# Altium PCB Aptomat_Radio.PcbDoc
Units mm, origin at the board's own origin, x right, y up, seen from the top; angles counter-clockwise.
Board outline 90 x 47 mm, 2 copper layers (Top Layer, Bottom Layer); 36 components, 54 nets, 142 pads, 476 vias.
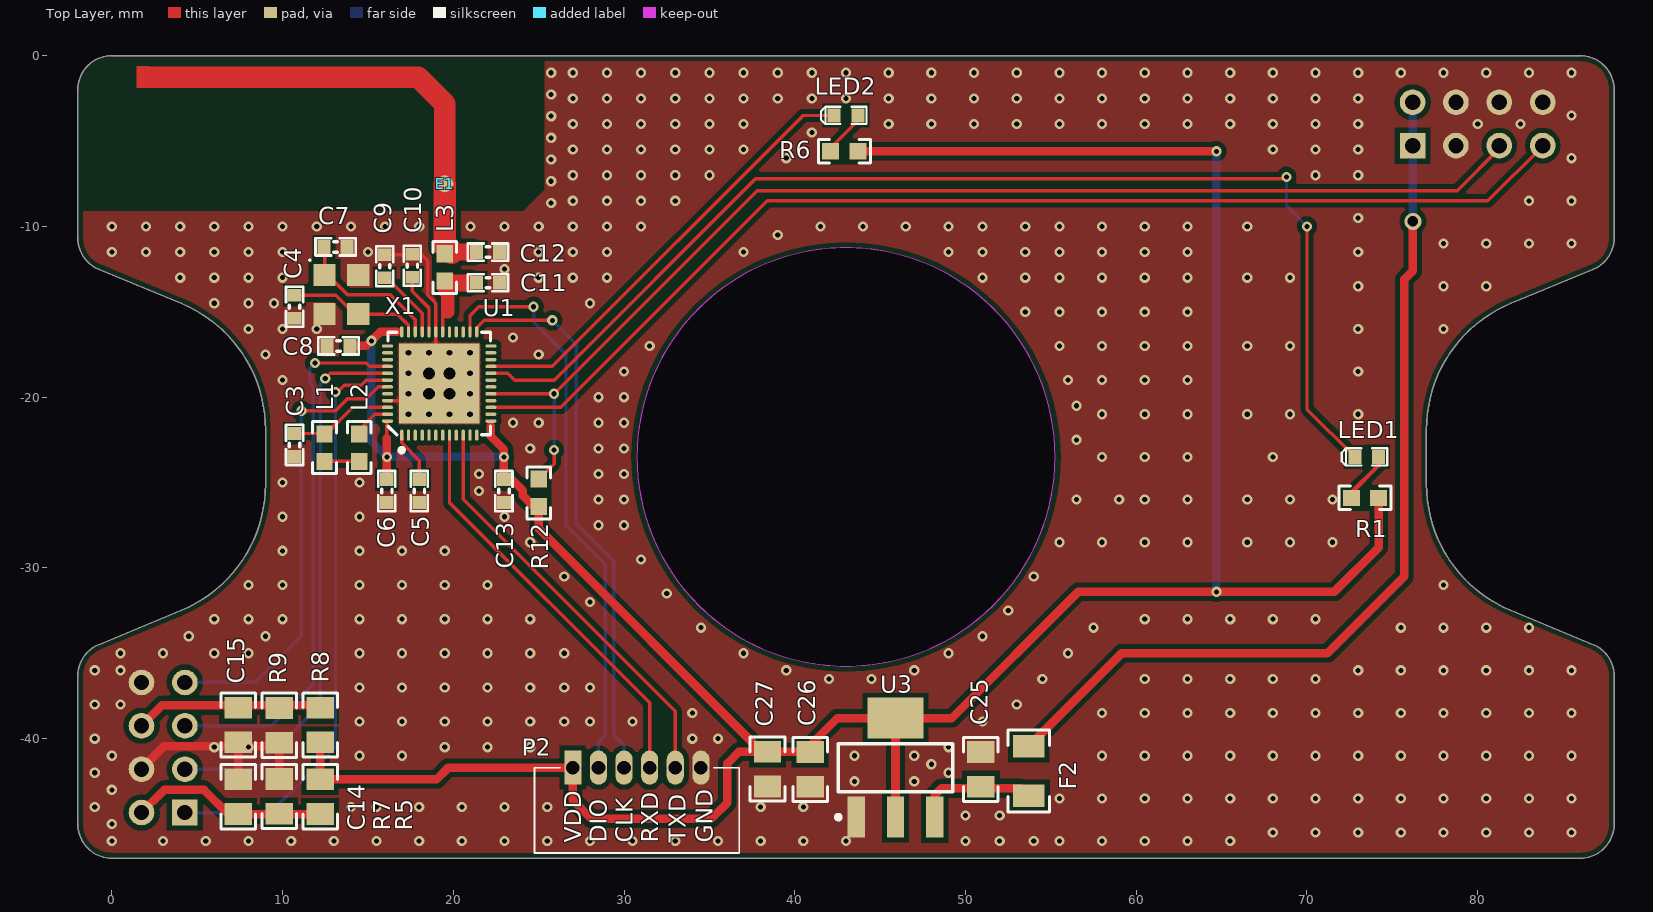
[diagram p0: Top Layer view]
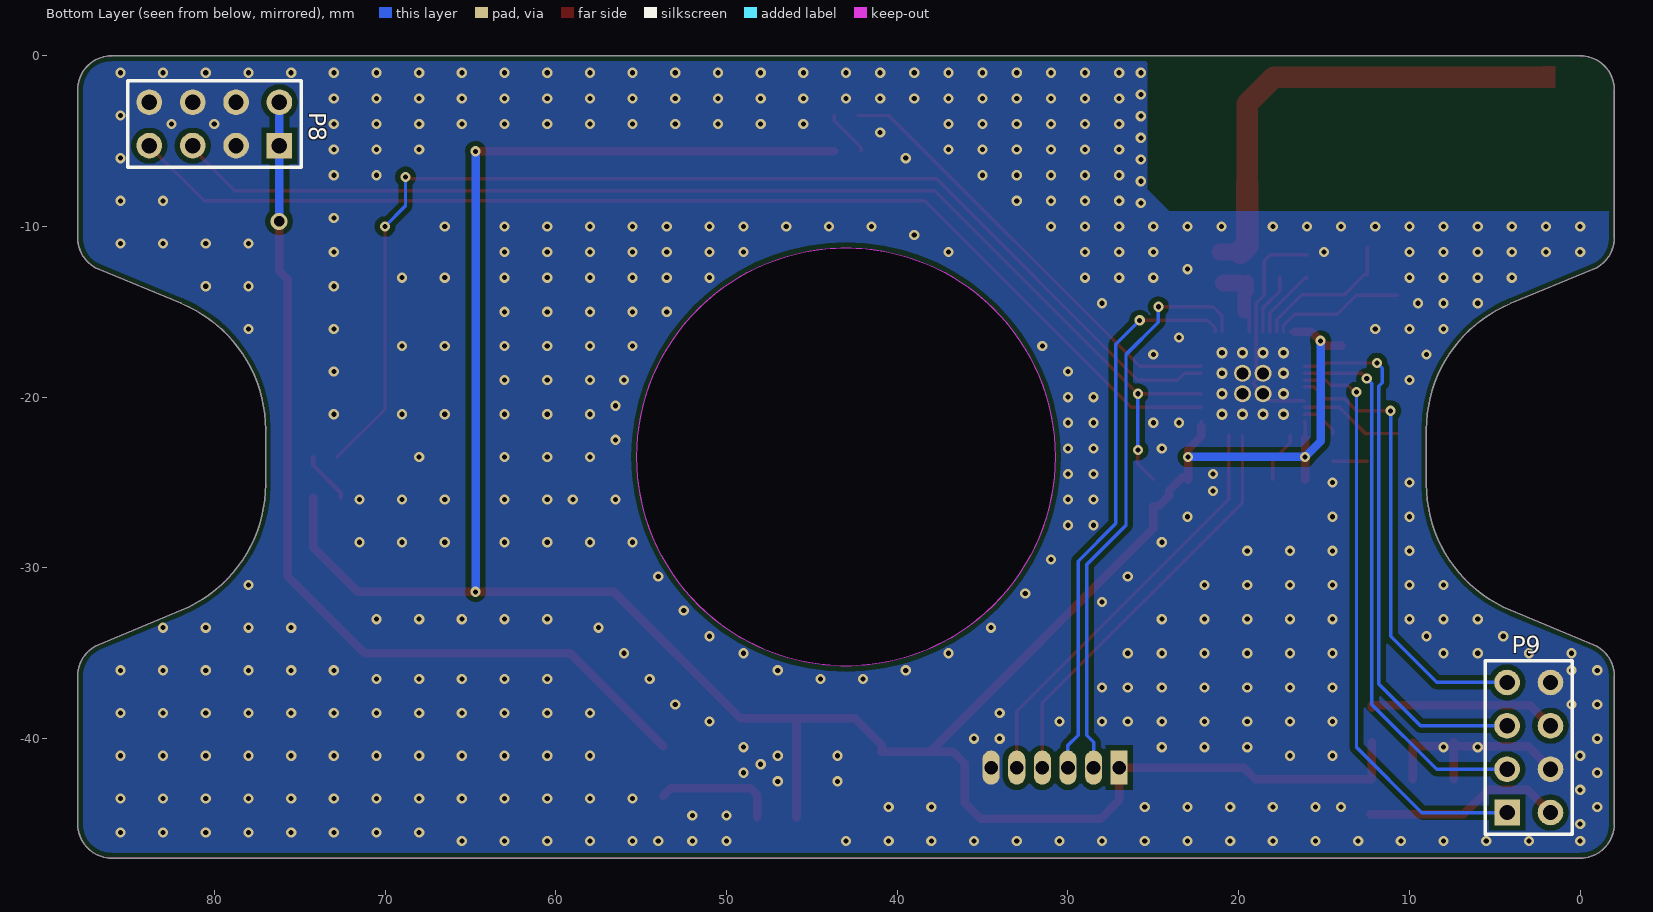
[diagram p1: Bottom Layer view, seen from below]

## Layer stack, top to bottom
Top Solder: solder mask 0.0102, Solder Resist, Dk 3.5
Top Layer: signal copper 0.0356
Dielectric 1: dielectric 0.32, FR-4, Dk 4.8
Bottom Layer: signal copper 0.0356
Bottom Solder: solder mask 0.0102, Solder Resist, Dk 3.5

## Board outline
-2,-45.01 ccw(c0,-45.01) 0,-47.01 86,-47.01 ccw(c86,-45.01) 88,-45.01 88,-36.346 ccw(c86,-36.346) 86.765,-34.498 81.939,-32.499 cw(c85,-25.108) 77,-25.108 77,-21.911 cw(c85,-21.911) 81.939,-14.52 86.765,-12.521 ccw(c86,-10.673) 88,-10.673 88,-2.01 ccw(c86,-2.01) 86,-0.01 0,-0.01 ccw(c0,-2.01) -2,-2.01 -2,-10.673 ccw(c0,-10.673) -0.765,-12.521 4.061,-14.52 cw(c1,-21.911) 9,-21.911 9,-25.108 cw(c1,-25.108) 4.061,-32.499 -0.765,-34.498 ccw(c0,-36.346) -2,-36.346
cut-out: 30.75,-23.51 ccw(c43,-23.51) 43,-35.76 ccw(c43,-23.51) 55.25,-23.51 ccw(c43,-23.51) 43,-11.26 ccw(c43,-23.51)

## Design rules (kind name [scope] priority, off if disabled: settings)
Clearance polygon [IsRegion] p1: gap=0.3
Clearance [All] p2: gap=0.2
MinimumSolderMaskSliver [All] p1: minsoldermaskwidth=0.1
PolygonConnect [All] p1: connectstyle=Direct reliefconductorwidth=0.254 reliefentries=4 polygonreliefangle="90 Angle" airgapwidth=0.254
RoutingVias [All] p1: holewidth=0.3 width=0.6 viastyle="Through Hole" minholewidth=0.3 minwidth=0.6 maxholewidth=5 maxwidth=5
SilkToSilkClearance [All] p1: silktosilkclearance=0.1
SilkToSolderMaskClearance [IsPad] p1: minsilkscreentomaskgap=0.01 clearancetoexposedcopper=TRUE
SolderMaskExpansion [All] p1: expansion=0.102
Width [All] p1: maxlimit=5 minlimit=0.2 preferedwidth=0.254
27 further rules are at their usual default settings.

## Classes and differential pairs
component class pca10040_sheet1_radio: C1 C2 C3 C4 C5 C6 C7 C8 C9 C10 C11 C12 C13 E1 L1 L2 L3 P1 P2 R1 R2 R3 R4 SB22 SB23 SB24 SB25 TP5 TP6 TP7 TP8 U1 X1
component class pca10040_sheet3_buttons_and_leds: C14 C15 C19 C20 C25 C26 C27 F2 LED1 LED2 P8 P9 R1 R5 R6 R7 R8 R9 R12 SB1 SW5 U3

## Components (designator, comment, footprint, x,y, rotation, side; value= is the part's Value field where it differs from the comment)
C3 "1.0µF" CAPC1608X06L 10.7,-22.81 r90 top
C4 "12pF" CAPC1608X06L 10.7,-14.71 r270 top
C5 "100nF" CAPC1608X06L 18.014,-25.508 r270 top
C6 "4.7µF" CAPC1608X06L 16.109,-25.508 r270 top
C7 "12pF" CAPC1608X06L 13.1,-11.21 r0 top
C8 "100nF" CAPC1608X06L 13.275,-17.01 r180 top
C9 "100pF" CAPC1608X06L 15.986,-12.345 r90 top
C10 "N.C." CAPC1608X06L 17.6,-12.31 r90 top
C11 "0.8pF" CAPC1608X06L 22.025,-13.31 r180 top
C12 "1.2pF" CAPC1608X06L 22.025,-11.51 r0 top
C13 "100nF" CAPC1608X06L 22.967,-25.508 r270 top
C14 "106" 0805_HV 7.4,-43.41 r270 top
C15 "106" 0805_HV 7.4,-39.21 r90 top
C25 "105" 0805_HV 50.9,-41.81 r270 top
C26 "105" 0805_HV 40.9,-41.81 r90 top
C27 "105" 0805_HV 38.4,-41.794 r90 top
E1 "Antenna" nrfant 19.5,-7.51 r180 top
F2 "Res" 1206 53.7,-41.91 r270 top
L1 "15nH" 0603 12.453,-22.968 r270 top
L2 "10µH" 0603 14.485,-22.968 r90 top
L3 "3.9nH" 0603 19.5,-12.41 r90 top
LED1 "L0603G" LED_0603_G 73.498,-23.511 r0 top locked
LED2 "L0603G" LED_0603_G 43,-3.51 r0 top locked
P2 "Header 6" CON6P-ZH1.5 27,-41.71 r0 top locked
P8 "Header 4X2" HDR2X4 76.185,-5.274 r0 bottom
P9 "Header 4X2" HDR2X4 4.278,-44.339 r90 bottom
R1 "220R" 0603 73.4,-25.91 r0 top
R5 "1K" 0805_HV 12.2,-43.41 r90 top
R6 "220R" 0603 42.9,-5.61 r0 top
R7 "2.2K" 0805_HV 9.8,-43.394 r90 top
R8 "1K" 0805_HV 12.2,-39.21 r270 top
R9 "2.2K" 0805_HV 9.8,-39.226 r270 top
R12 "100k" 0603 25,-25.61 r270 top
U1 "nRF52832-QFAA" QFN40P600X600X90-48N 19.175,-19.21 r90 top locked
U3 "AMS1117-3.3V SOT223 _MH" SOT223 45.9,-41.71 r0 top
X1 "CX3225SB32000D0FFFCC" SON230P260X60-4N 13.446,-13.996 r0 top

## Footprints (in the part's own frame and the unit in brackets; to place one, negate y for a bottom-side part, rotate by r counter-clockwise, add the part's x,y. Pads: shape width x height; smd on the part's side, far side on the other; paste and mask are expansions set on the pad)
0603 [mm] "0603 from SM-752 data"
  rect 1x0.95 smd: 1(-0.8,0) 2(0.8,0)
  silkscreen extent -1.52,-0.69 1.52,0.69, body extent -0.87,-0.47 0.87,0.47, height 1
0805_HV [mil] "0805 with 30mil clearance between pads"
  rect 50x63 smd: 1(-40,0) 2(40,0)
  silkscreen extent -74,-40 74,40, body extent -43,-29 43,29, height 57
1206 [mm] "1206 from SM-752 data"
  rect 1.3x1.85 smd: 1(1.45,0) 2(-1.45,0)
  silkscreen extent -2.4,-1.21 2.4,1.21, body extent -1.7,-0.9 1.7,0.9, height 1.35
CAPC1608X06L [mm]
  rect 0.75x0.8 smd: 1(-0.675,0) 2(0.675,0)
  silkscreen extent -1.17,-0.5 1.17,0.5, body extent -0.8,-0.43 0.8,0.43, height 0.8
CON6P-ZH1.5 [mm] "CON6"
  rect 1x2 hole 0.8 paste+0: 1(0,0)
  oval 1x2 hole 0.8 paste+0: 2(1.5,0) 3(3,0) 4(4.5,0) 5(6,0) 6(7.5,0)
  silkscreen extent -2.25,-5 9.75,0
HDR2X4 [mm] "Connector; Header; 4x2 Position"
  rect 1.5x1.5 hole 0.9: 1(0,0)
  round 1.5 hole 0.9: 2(0,-2.54) 3(2.54,0) 4(2.54,-2.54) 5(5.08,0) 6(5.08,-2.54) 7(7.62,0) 8(7.62,-2.54)
  silkscreen extent -1.27,-3.81 8.89,1.27
LED_0603_G [mil]
  rect 30x32 smd: 1(-27.5,0) 2(27.5,0)
  silkscreen extent -58,-20 48,20, body extent -32,-16 32,16, height 24
nrfant [mm]
  round 1 smd: 1(0,0)
  Top Layer region: 17.286,-5.617 17.286,-6.887 18.048,-6.887 18.048,-5.617
  Top Layer lines w1.27: 17.401,-6.248 1.559,-6.248 ; 0,0 0,-4.689 ; 1.559,-6.248 1.559,-6.248 ; 1.559,-6.248 0,-4.689 ; 0,-4.689 0,-4.689
QFN40P600X600X90-48N [mm]
  oval 0.65x0.2 smd: 1(-3.025,2.2) 2(-3.025,1.8) 3(-3.025,1.4) 4(-3.025,1) 5(-3.025,0.6) 6(-3.025,0.2) 7(-3.025,-0.2) 8(-3.025,-0.6) 9(-3.025,-1) 10(-3.025,-1.4) 11(-3.025,-1.8) 12(-3.025,-2.2) 25(3.025,-2.2) 26(3.025,-1.8) 27(3.025,-1.4) 28(3.025,-1) 29(3.025,-0.6) 30(3.025,-0.2) 31(3.025,0.2) 32(3.025,0.6) 33(3.025,1) 34(3.025,1.4) 35(3.025,1.8) 36(3.025,2.2)
  oval 0.2x0.65 smd: 13(-2.2,-3.025) 14(-1.8,-3.025) 15(-1.4,-3.025) 16(-1,-3.025) 17(-0.6,-3.025) 18(-0.2,-3.025) 19(0.2,-3.025) 20(0.6,-3.025) 21(1,-3.025) 22(1.4,-3.025) 23(1.8,-3.025) 24(2.2,-3.025) 37(2.2,3.025) 38(1.8,3.025) 39(1.4,3.025) 40(1,3.025) 41(0.6,3.025) 42(0.2,3.025) 43(-0.2,3.025) 44(-0.6,3.025) 45(-1,3.025) 46(-1.4,3.025) 47(-1.8,3.025) 48(-2.2,3.025)
  rect 4.7x4.7 smd: 49(0,0)
  silkscreen extent -4.02,-3 3,3, body extent -3.02,-3.02 3.02,3.02, height 0.86
SON230P260X60-4N [mm] "SON, 4-Leads, Body 3.25x2.55mm, Pitch 2.30mm, IPC Medium Density"
  rect 1.3x1.3 smd: 1(-0.985,1.15) 2(-0.985,-1.15) 3(0.985,-1.15) 4(0.985,1.15)
  silkscreen extent -1.9,1.96 -1.8,2.06, body extent -1.3,-1.65 1.3,1.65, height 0.6
SOT223 [mm]
  rect 1x2.4 smd: 1(-2.3,-2.9) 2(0,-2.9) 3(2.3,-2.9)
  rect 3.3x2.4 smd: 4(0,2.9)
  silkscreen extent -3.47,-3.02 3.35,1.4, body extent -3.25,-3.56 3.25,3.4, height 1.68

## Part data
C3: library part C0603-1µ0, "Capacitor, X7R, ±10%"
C4 C7: library part C0402-12p, "Capacitor, NP0, ±2%"
C5 C8 C13: library part C0402-100n, "Capacitor, X7R, ±10%"
C6: library part C0603-4µ7, "Capacitor, X5R, ±10%"
C9: library part C0402-100p, "Capacitor, NP0, ±5%"
C10: library part C0402-N.C., "Not mounted"
C11: library part C0402-0.8p, "Capacitor, NP0, ±5%"
C12: library part C0402-1.2p, "Capacitor, NP0, ±0.1pF"
C14 C15 C25 C26 C27: library part CM, "Cap SMD"
E1: "Generic Antenna"
F2: library part Res-SMD, "Resistor"
L1: library part L0402-15n, "Inductor, 320mA, ±5%"
L2: library part L0603-10µ, "Inductor, 80mA, ±10%"
L3: library part L0402-3n9, "Inductor, 170mA, ±0.1nH"
LED1 LED2: library part "LG L29K Smartled Green", "LED SMARTLED GREEN 570NM 0603"
P2: "Header, 6-Pin"
P8 P9: "Header, 4-Pin, Dual row"
R1 R6: library part R0402-220, "Resistor, ±1%, 0.063W"
R5 R7 R8 R9 R12: library part R0402-100k, "Resistor, ±1%, 0.063W"
U1: "Multi-protocol Bluetooth Low Energy and 2.4GHz proprietary system-on-chip"
X1: library part XTAL_SMD2016_32MHz_8pF_Epson, "XTAL SMD 2016, 32MHz, Cl=8pF, Tol: ±10ppm, Stab: ±10ppm"

## Free pads (board coordinates)
  round 1 hole 0.7 paste+0: 0(18.575,-18.61) 1(18.575,-19.81) 2(19.775,-19.81) 3(19.775,-18.61)

## Via types
v1: diameter 0.6, hole 0.3, Top Layer to Bottom Layer, tented both sides, 459 vias
v2: diameter 0.66, hole 0.33, Top Layer to Bottom Layer, tented both sides, 16 vias
v3: diameter 1, hole 0.6, Top Layer to Bottom Layer, tented both sides, 1 vias

## Nets (pads, with @x,y where several pads share a name; then routed paths per layer and width w, separated by ;. In a path a pad name is that pad's centre, name@x,y a point inside that pad or via, vN(x,y) a via of type N, cw(c..) or ccw(c..) an arc to the next point about the centre after c; other vN are vias at no path point)
ANT: C12.1 E1.1 L3.2 | length 5.4
  Top Layer w1: L3.2@19.9,-11.51 C12.1@21.1,-11.51
  Top Layer w1.3: 19.5,-11.11 E1.1
  Top Layer w1.4: 19.5,-11.11 L3.2@19.9,-11.51
BUTTON1: P8.5 R12.1 U1.17 | length 70.6
  Top Layer w0.2: U1.17 v1(25.9,-19.81) 37.8,-7.91 78.8,-7.91 81.265,-5.445 P8.5 ; R12.1 25.9,-23.91 v1(25.9,-23.11)
  Bottom Layer w0.2: v1(25.9,-23.11) v1(25.9,-19.81)
CTS: 
CURRENT_SIGNAL1: P9.1 U1.42 | length 34.5
  Top Layer w0.2: v1(13.1,-19.71) 13.2,-19.71 13.6,-19.31 14.6,-19.31 14.9,-19.01 U1.42
  Bottom Layer w0.2: P9.1 9.271,-44.339 13.1,-40.51 v1(13.1,-19.71)
CURRENT_SIGNAL2: P9.3 U1.41 | length 32.5
  Top Layer w0.2: v1(12.5,-18.91) 12.8,-18.61 U1.41
  Bottom Layer w0.2: P9.3 8.411,-41.799 12.2,-38.01 12.2,-19.21 v1(12.5,-18.91)
CURRENT_SIGNAL3: P9.5 U1.40 | length 31.9
  Top Layer w0.2: v1(11.9,-18.01) 14.9,-18.01 15.1,-18.21 U1.40
  Bottom Layer w0.2: P9.5 9.351,-39.259 11.8,-36.81 11.8,-19.376 11.6,-19.176 11.6,-18.31 v1(11.9,-18.01)
DEC1: C5.1 U1.1 | length 3
  Top Layer w0.2: U1.1 16.975,-22.685 18.014,-23.724 C5.1
DEC2: C10.1 U1.32 | length 3.6
  Top Layer w0.2: C10.1 17.6,-13.81 18.575,-14.785 U1.32
DEC3: C9.1 U1.33 | length 4.1
  Top Layer w0.2: C9.1 16.11,-13.02 18.175,-15.085 U1.33
DEC4: C3.2 L1.1 U1.46 | length 6.1
  Top Layer w0.2: C3.2 12.42,-22.135 L1.1 12.542,-22.168 14.1,-20.61 U1.46
GND: C3.1 C4.2 C5.2 C6.2 C7.2 C8.2 C9.2 C10.2 C11.1 C12.2 C13.2 C14.1 C15.1 C25.1 C26.1 C27.1 P2.6 P8.3 P8.4 P8.6 P8.8 P9.4 P9.8 pad.0 pad.1 pad.2 pad.3 R7.2 R9.2 U1.31 U1.45 U1.49 U3.1 X1.2 X1.4 | length 26.6
  Top Layer w0.2: C9.2 18.16,-11.67 18.5,-12.01 18.5,-14.034 18.975,-14.509 U1.31 18.975,-19.01 U1.49 v2(18.575,-19.81) 18.175,-20.21 U1.45
  Top Layer w0.5: P9.4 1.738,-41.772 3.051,-40.459 C15.1@7.4,-40.459 ; C14.1 C15.1@7.4,-40.459 ; C15.1 C15.1@7.4,-40.459 ; R7.2 R9.2 9.583,-40.459 C15.1@7.4,-40.459
  other v1: 0,-46.01 3,-46.01 5.5,-46.01 8,-46.01 10.5,-46.01 13,-46.01 15.5,-46.01 18,-46.01 20.5,-46.01 23,-46.01 25.5,-46.01 28,-46.01 30.5,-46.01 33,-46.01 35.5,-46.01 38,-46.01 40.5,-46.01 43,-46.01 50,-46.01 52,-46.01 54,-46.01 55.5,-46.01 58,-46.01 60.5,-46.01 63,-46.01 65.5,-46.01 68,-45.51 70.5,-45.51 73,-45.51 75.5,-45.51 78,-45.51 80.5,-45.51 83,-45.51 85.5,-45.51 0,-45.01 50,-44.51 52,-44.51 -1,-44.01 14,-44.01 15.5,-44.01 18,-44.01 20.5,-44.01 23,-44.01 25.5,-44.01 38,-44.01 40.5,-44.01 55.5,-43.51 58,-43.51 60.5,-43.51 63,-43.51 65.5,-43.51 68,-43.51 70.5,-43.51 73,-43.51 75.5,-43.51 78,-43.51 80.5,-43.51 83,-43.51 85.5,-43.51 0,-43.01 43.5,-42.51 47,-42.51 -1,-42.01 49,-42.01 48,-41.51 0,-41.01 14.5,-41.01 17,-41.01 43.5,-41.01 47,-41.01 58,-41.01 60.5,-41.01 63,-41.01 65.5,-41.01 68,-41.01 70.5,-41.01 73,-41.01 75.5,-41.01 78,-41.01 80.5,-41.01 83,-41.01 85.5,-41.01 6,-40.51 8,-40.51 19.5,-40.51 22,-40.51 24.5,-40.51 49,-40.51 -1,-40.01 34,-40.01 35.5,-40.01 14.5,-39.01 17,-39.01 19.5,-39.01 22,-39.01 24.5,-39.01 26.5,-39.01 28,-39.01 30.5,-39.01 51,-39.01 34,-38.51 58,-38.51 60.5,-38.51 63,-38.51 65.5,-38.51 68,-38.51 70.5,-38.51 73,-38.51 75.5,-38.51 78,-38.51 80.5,-38.51 83,-38.51 85.5,-38.51 -1,-38.01 0.5,-38.01 53,-38.01 14.5,-37.01 17,-37.01 19.5,-37.01 22,-37.01 24.5,-37.01 26.5,-37.01 28,-37.01 42,-36.51 44.5,-36.51 54.5,-36.51 60.5,-36.51 63,-36.51 65.5,-36.51 68,-36.51 70.5,-36.51 -1,-36.01 0.5,-36.01 39.5,-36.01 47,-36.01 73,-36.01 75.5,-36.01 78,-36.01 80.5,-36.01 83,-36.01 85.5,-36.01 0.5,-35.01 3,-35.01 6,-35.01 8,-35.01 14.5,-35.01 17,-35.01 19.5,-35.01 22,-35.01 24.5,-35.01 26.5,-35.01 37,-35.01 49,-35.01 56,-35.01 4.5,-34.01 9,-34.01 51,-34.01 34.5,-33.51 57.5,-33.51 75.5,-33.51 78,-33.51 80.5,-33.51 83,-33.51 6,-33.01 8,-33.01 10,-33.01 14.5,-33.01 17,-33.01 19.5,-33.01 22,-33.01 24.5,-33.01 60.5,-33.01 63,-33.01 65.5,-33.01 68,-33.01 70.5,-33.01 52.5,-32.51 28,-32.01 32.5,-31.51 8,-31.01 10,-31.01 14.5,-31.01 17,-31.01 19.5,-31.01 22,-31.01 78,-31.01 26.5,-30.51 54,-30.51 31,-29.51 10,-29.01 14.5,-29.01 17,-29.01 19.5,-29.01 24.5,-28.51 55.5,-28.51 58,-28.51 60.5,-28.51 63,-28.51 66.5,-28.51 69,-28.51 71.5,-28.51 28.5,-27.51 30,-27.51 10,-27.01 14.5,-27.01 23,-27.01 28.5,-26.01 30,-26.01 56.5,-26.01 59,-26.01 60.5,-26.01 63,-26.01 66.5,-26.01 69,-26.01 71.5,-26.01 21.5,-25.51 10,-25.01 14.5,-25.01 21.5,-24.51 28.5,-24.51 30,-24.51 58,-23.51 60.5,-23.51 63,-23.51 68,-23.51 24.5,-23.01 28.5,-23.01 30,-23.01 56.5,-22.51 23.5,-21.51 25,-21.51 28.5,-21.51 30,-21.51 58,-21.01 60.5,-21.01 63,-21.01 66.5,-21.01 69,-21.01 73,-21.01 56.5,-20.51 28.5,-20.01 30,-20.01 10,-19.01 56,-19.01 58,-19.01 60.5,-19.01 63,-19.01 30,-18.51 73,-18.51 9,-17.51 25,-17.51 31.5,-17.01 55.5,-17.01 58,-17.01 60.5,-17.01 63,-17.01 66.5,-17.01 69,-17.01 23.5,-16.51 8,-16.01 10,-16.01 12,-16.01 73,-16.01 78,-16.01 53.5,-15.01 55.5,-15.01 58,-15.01 60.5,-15.01 63,-15.01 6,-14.51 8,-14.51 9.5,-14.51 28,-14.51 73,-13.51 78,-13.51 80.5,-13.51 4,-13.01 6,-13.01 8,-13.01 10,-13.01 25,-13.01 27,-13.01 29,-13.01 51,-13.01 53.5,-13.01 55.5,-13.01 58,-13.01 60.5,-13.01 63,-13.01 66.5,-13.01 69,-13.01 23,-12.51 0,-11.51 2,-11.51 4,-11.51 6,-11.51 8,-11.51 10,-11.51 15,-11.51 25,-11.51 27,-11.51 29,-11.51 37,-11.51 49,-11.51 51,-11.51 53.5,-11.51 55.5,-11.51 58,-11.51 60.5,-11.51 63,-11.51 73,-11.51 78,-11.01 80.5,-11.01 83,-11.01 85.5,-11.01 39,-10.51 0,-10.01 2,-10.01 4,-10.01 6,-10.01 8,-10.01 10,-10.01 12,-10.01 14,-10.01 16,-10.01 18,-10.01 21,-10.01 23,-10.01 25,-10.01 27,-10.01 29,-10.01 31,-10.01 41.5,-10.01 44,-10.01 46.5,-10.01 49,-10.01 51,-10.01 53.5,-10.01 55.5,-10.01 58,-10.01 60.5,-10.01 63,-10.01 66.5,-10.01 73,-9.51 25.73,-8.63 27,-8.51 29,-8.51 31,-8.51 33,-8.51 83,-8.51 85.5,-8.51 25.73,-7.36 27,-7.01 29,-7.01 31,-7.01 33,-7.01 35,-7.01 70.5,-7.01 73,-7.01 25.73,-6.09 39.5,-6.01 85.5,-6.01 27,-5.51 29,-5.51 31,-5.51 33,-5.51 35,-5.51 37,-5.51 68,-5.51 70.5,-5.51 73,-5.51 25.73,-4.82 41,-4.51 27,-4.01 29,-4.01 31,-4.01 33,-4.01 35,-4.01 37,-4.01 45.5,-4.01 48,-4.01 50.5,-4.01 53,-4.01 55.5,-4.01 58,-4.01 60.5,-4.01 63,-4.01 65.5,-4.01 68,-4.01 70.5,-4.01 73,-4.01 80,-4.01 82.5,-4.01 25.73,-3.55 85.5,-3.51 27,-2.51 29,-2.51 31,-2.51 33,-2.51 35,-2.51 37,-2.51 39,-2.51 41,-2.51 43,-2.51 45.5,-2.51 48,-2.51 50.5,-2.51 53,-2.51 55.5,-2.51 58,-2.51 60.5,-2.51 63,-2.51 65.5,-2.51 68,-2.51 70.5,-2.51 73,-2.51 25.73,-2.28 25.73,-1.01 27,-1.01 29,-1.01 31,-1.01 33,-1.01 35,-1.01 37,-1.01 39,-1.01 41,-1.01 43,-1.01 45.5,-1.01 48,-1.01 50.5,-1.01 53,-1.01 55.5,-1.01 58,-1.01 60.5,-1.01 63,-1.01 65.5,-1.01 68,-1.01 70.5,-1.01 73,-1.01 75.5,-1.01 78,-1.01 80.5,-1.01 83,-1.01 85.5,-1.01
  other v2: 17.375,-21.01 18.575,-21.01 19.775,-21.01 20.975,-21.01 17.375,-19.81 19.775,-19.81 20.975,-19.81 17.375,-18.61 18.575,-18.61 19.775,-18.61 20.975,-18.61 17.375,-17.41 18.575,-17.41 19.775,-17.41 20.975,-17.41
LED1: LED1.1 U1.20 | length 69.8
  Top Layer w0.2: U1.20 23.2,-18.61 23.6,-19.01 25.9,-19.01 37.7,-7.21 68.7,-7.21 v1(68.8,-7.11) ; v1(70,-10.01) 70,-20.712 LED1.1
  Bottom Layer w0.2: v1(68.8,-7.11) 68.8,-8.81 v1(70,-10.01)
LED2: LED2.1 U1.21 | length 26.2
  Top Layer w0.2: U1.21 25.8,-18.21 40.5,-3.51 LED2.1
NetC11_2: C11.2 L3.1 U1.30 | length 4.3
  Top Layer w0.2: U1.30 19.375,-14.81
  Top Layer w0.8: L3.1@19.5,-13.31 L3.1 19.5,-13.81 19.675,-13.985 19.675,-15.013
  Top Layer w1: 20,-13.31 20.9,-13.31
NetC25_2: C25.2 F2.1 U3.3 | length 7.2
  Top Layer w0.5: U3.3 48.2,-43.31 48.6,-42.91 53.25,-42.91 F2.1
NetL1_2: L1.2 L2.1 | length 2
  Top Layer w0.2: L1.2 L2.1
NetL2_2: L2.2 U1.47 | length 2.3
  Top Layer w0.2: L2.2 14.485,-21.925 15.4,-21.01 U1.47
NetLED1_2: LED1.2 R1.1 | length 3.1
  Top Layer w0.254: R1.1 72.6,-25.61 74.197,-24.014 LED1.2
NetLED2_2: LED2.2 R6.1 | length 2.8
  Top Layer w0.2: R6.1 42.1,-5.41 43.699,-3.812 LED2.2
P0.00: U1.2
P0.01: U1.3
P0.02: U1.4
P0.03: U1.5
P0.04: U1.6
P0.05: U1.7
P0.06: P2.4 U1.8 | length 24.3
  Top Layer w0.2: U1.8 19.775,-26.185 31.5,-37.91 P2.4
P0.07: U1.9
P0.08: P2.5 U1.10 | length 24.6
  Top Layer w0.2: U1.10 20.575,-25.985 33,-38.41 P2.5
P0.09/NFC1: U1.11
P0.10/NFC2: U1.12
P0.11: U1.14
P0.12: P8.7 U1.15 | length 68
  Top Layer w0.2: U1.15 26.3,-20.61 38.4,-8.51 80.6,-8.51 83.805,-5.305 P8.7
P0.13: U1.16
P0.15: U1.18
P0.16: U1.19
P0.19: U1.22
P0.20: U1.23
P0.21: U1.24
P0.22: U1.27
P0.23: U1.28
P0.24: U1.29
P0.25: U1.37
P0.26: U1.38
P0.27: U1.39
P0.31: P9.7 U1.43 | length 26.8
  Top Layer w0.2: v1(11.1,-20.81) 13.1,-20.81 13.8,-20.11 14.9,-20.11 15.6,-19.41 U1.43
  Bottom Layer w0.2: P9.7 8.391,-36.719 11.1,-34.01 v1(11.1,-20.81)
RTS: 
SWDCLK: P2.3 U1.25 | length 32.8
  Top Layer w0.2: U1.25 21.375,-15.935 21.8,-15.51 v1(25.8,-15.51)
  Bottom Layer w0.2: v1(25.8,-15.51) 27.2,-16.91 27.2,-27.41 29.4,-29.61 29.4,-39.81 30,-40.41 P2.3
SWDIO: P2.2 U1.26 | length 33.8
  Top Layer w0.2: U1.26 20.975,-15.235 21.5,-14.71 v1(24.7,-14.71)
  Bottom Layer w0.2: v1(24.7,-14.71) 24.7,-15.61 26.6,-17.51 26.6,-27.51 28.9,-29.81 28.9,-39.81 28.5,-40.21 P2.2
VCC_RELAY: F2.2 P8.1 P8.2 | length 54.1
  Top Layer w0.5: F2.2 59.15,-35.01 71.2,-35.01 75.7,-30.51 75.7,-13.11 76.2,-12.61 v3(76.2,-9.71)
  Bottom Layer w0.5: v3@76.185,-9.695 P8.1 P8.2
VDD_NRF: C6.1 C8.1 C13.1 C26.2 C27.2 P2.1 R1.2 R5.2 R6.2 R8.2 R12.2 U1.13 U1.36 U1.48 U3.2 U3.4 | length 177.3
  Top Layer w0.2: 16.109,-22.41 16.109,-21.451 U1.48 ; 16.7,-16.185 U1.36 ; 22.2,-21.71 U1.13
  Top Layer w0.5: R8.2 R5.2 19.016,-42.394 19.7,-41.71 P2.1 27,-43.61 28.1,-44.71 35.1,-44.71 36.05,-43.76 36.05,-41.46 36.732,-40.778 C27.2@38.068,-40.778 ; C8.1 14.9,-17.01 15.725,-16.185 16.7,-16.185 ; C6.1 v1(16.109,-23.51) 16.109,-22.41 ; 22.2,-21.71 22.2,-22.31 22.967,-23.077 v1(22.967,-23.51) C13.1 ; C13.1@23.3,-24.71 24.075,-25.485 24.075,-25.785 24.7,-26.41 R12.2 25,-27.71 C27.2@38.068,-40.778 ; C26.2 C26.2@40.9,-40.778 ; R6.2 v1@64.6,-5.61 ; U3.2 U3.4 ; R1.2 74.2,-28.81 71.6,-31.41 v1(64.7,-31.41) 56.6,-31.41 49.2,-38.81 U3.4 ; C27.2@38.068,-40.778 C27.2 C26.2@40.9,-40.778 ; C26.2@40.9,-40.778 40.9,-40.41 42.5,-38.81 U3.4
  Bottom Layer w0.5: v1(15.2,-16.71) 15.2,-22.601 v1(16.109,-23.51) v1(22.967,-23.51) ; v1(64.7,-31.41) v1(64.7,-5.61)
VOFFSET_CURRENT: C14.2 P9.2 R5.1 R7.1 | length 11.7
  Top Layer w0.5: P9.2 3.067,-43.01 5.4,-43.01 6.832,-44.442 9.8,-44.442 R5.1@12.3,-44.442
VOFFSET_VOL: C15.2 P9.6 R8.1 R9.1 | length 11.1
  Top Layer w0.5: P9.6 2.938,-38.059 12.2,-38.059 R8.1
XC1: C7.1 U1.34 X1.1 | length 8.8
  Top Layer w0.2: C7.1 12.461,-11.246 X1.1 12.636,-12.846 13.8,-14.01 16.3,-14.01 17.775,-15.485 U1.34
XC2: C4.1 U1.35 X1.3 | length 7.8
  Top Layer w0.2: C4.1 13.125,-14.035 14.236,-15.146 X1.3 16.726,-15.146 17.375,-15.794 U1.35
pads on no net: U1.44

## Polygon pours and split planes (outlines as drawn)
GND on Top Layer "Bottom Layer-No Net" (solid, remove dead copper, pour order 4): 304 vertices, not listed, extent -2,-47.019 88,-0.01
GND on Bottom Layer "Bottom Layer-No Net" (solid, remove dead copper, pour order 3): 304 vertices, not listed, extent -2,-47.019 88,-0.01

## Keep-outs
Keep-Out Layer:
  circle w0.013: c43,-23.51 r12.25
  lines w0.013: -2,-45.01 ccw(c0,-45.01) 0,-47.01 86,-47.01 ccw(c86,-45.01) 88,-45.01 88,-36.346 ccw(c86,-36.346) 86.765,-34.498 81.939,-32.499 cw(c85,-25.108) 77,-25.108 77,-21.911 cw(c85,-21.911) 81.939,-14.52 86.765,-12.521 ccw(c86,-10.673) 88,-10.673 88,-2.01 ccw(c86,-2.01) 86,-0.01 0,-0.01 ccw(c0,-2.01) -2,-2.01 -2,-10.673 ccw(c0,-10.673) -0.765,-12.521 4.061,-14.52 cw(c1,-21.911) 9,-21.911 9,-25.108 cw(c1,-25.108) 4.061,-32.499 -0.765,-34.498 ccw(c0,-36.346) -2,-36.346 -2,-45.01

## Silkscreen, mask and mechanical layers (free items; w line width, h text height)
Top Overlay:
  text "VDD" at 27.5,-46.11 h1 r90
  text "DIO" at 29,-46.11 h1 r90
  text "CLK" at 30.5,-46.11 h1 r90
  text "RXD" at 32,-46.11 h1 r90
  text "TXD" at 33.6,-46.11 h1 r90
  text "GND" at 35.2,-46.11 h1 r90
Mechanical 1:
  drawing of 224 lines, arcs and shapes, not listed